# EAGLE board frisk-half (EAGLE 5.11)
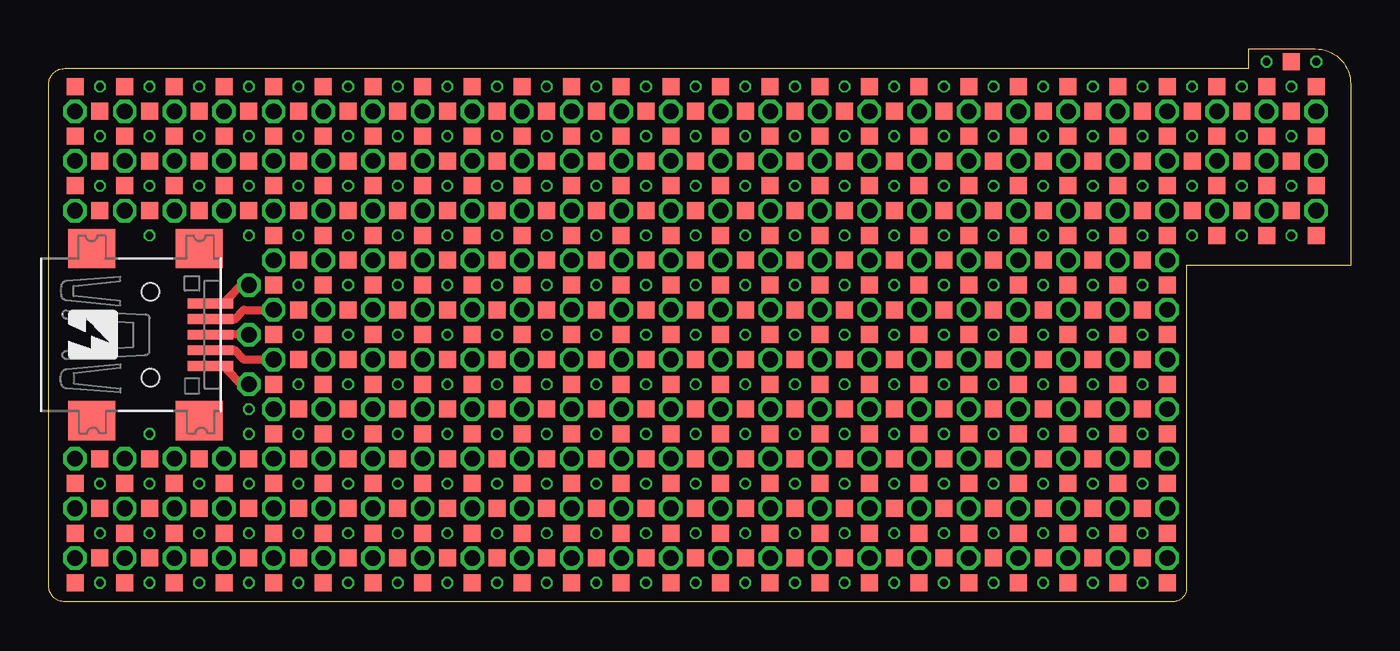
[diagram p0: board, top side]
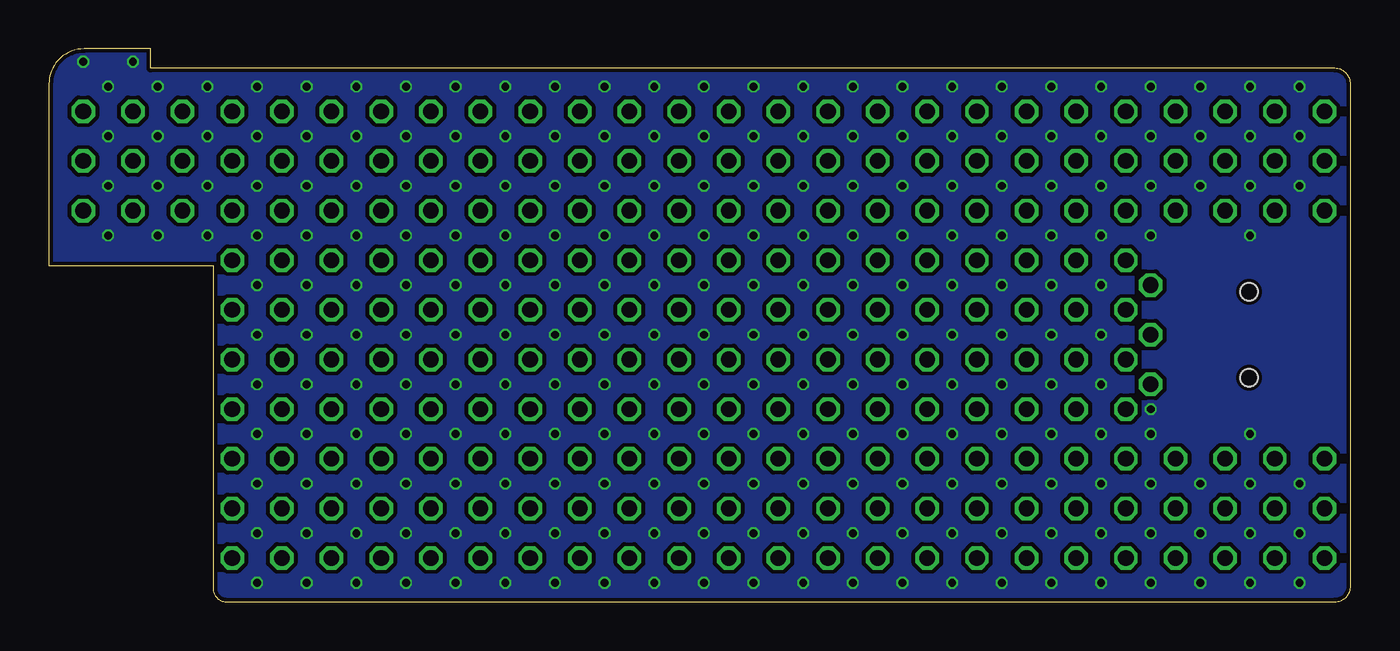
[diagram p1: board, bottom side, seen from below]

Size 66.6 x 28.3 mm. Coordinates in mm from the lower left corner, seen from the top.
Outline: 66.6,17.2 58.2,17.2 58.2,0.8 arc-90 57.6,0 0.8,0 arc-90 0,0.8 0,26.5 arc-90 0.8,27.3 61.4,27.3 61.4,28.3 64.8,28.3 arc-90 66.6,26.5 66.6,17.2
Copper layers (1*16): Top 0.035mm / dielectric 1.5mm / Bottom 0.035mm
Design rules "PCBCartFine *": minimum track width 0.2mm, minimum drill 0.4mm, track to track 0.2mm, track to pad 0.2mm, pad to pad 0.2mm, via to via 0.2mm, smd to smd 0.2mm, copper to edge 0.2mm, drill to drill 0.2mm, minimum pad ring 0.1mm, minimum via ring 0.1mm, stop-mask expansion 4mil, vias tented up to drill 0.5mm, thermal gap 0.2mm

## Footprints (pad centres in the part's own frame; a part is rotated, then mirrored left to right if it is on the bottom)
PAD = smd 0.87 x 0.87: P$1 0,0
USB-MINIB = smd 0.5 x 2.308: D+ 0,4.064; D- -0.8,4.064; GND 1.6,4.064; ID 0.8,4.064; VBUS -1.6,4.064 | smd 2 x 2.4: GND1 -4.4,-2; GND2 -4.4,3.5; GND3 4.4,3.5; GND4 4.4,-2 | hole 0.9: -2.2,1; 2.2,1

## Placement (x,y rotation side)
E$1  [PAD]  2.61,25.1 0 top
E$2  [PAD]  5.15,25.1 0 top
E$3  [LOGO]  3.52,12.4 90 top
E$4  [USB-MINIB]  4.2,13.67 270 top
E$5  [PAD]  7.69,25.1 0 top
E$6  [PAD]  10.23,25.1 0 top
E$7  [PAD]  12.77,25.1 0 top
E$8  [PAD]  15.31,25.1 0 top
E$9  [PAD]  17.85,25.1 0 top
E$10  [PAD]  20.39,25.1 0 top
E$11  [PAD]  22.93,25.1 0 top
E$12  [PAD]  1.34,23.83 0 top
E$13  [PAD]  3.88,23.83 0 top
E$14  [PAD]  6.42,23.83 0 top
E$15  [PAD]  8.96,23.83 0 top
E$16  [PAD]  11.5,23.83 0 top
E$17  [PAD]  14.04,23.83 0 top
E$18  [PAD]  16.58,23.83 0 top
E$19  [PAD]  19.12,23.83 0 top
E$20  [PAD]  21.66,23.83 0 top
E$21  [PAD]  2.61,22.56 0 top
E$22  [PAD]  5.15,22.56 0 top
E$23  [PAD]  7.69,22.56 0 top
E$24  [PAD]  10.23,22.56 0 top
E$25  [PAD]  12.77,22.56 0 top
E$26  [PAD]  15.31,22.56 0 top
E$27  [PAD]  17.85,22.56 0 top
E$28  [PAD]  20.39,22.56 0 top
E$29  [PAD]  1.34,21.29 0 top
E$30  [PAD]  3.88,21.29 0 top
E$31  [PAD]  6.42,21.29 0 top
E$32  [PAD]  8.96,21.29 0 top
E$33  [PAD]  11.5,21.29 0 top
E$34  [PAD]  14.04,21.29 0 top
E$35  [PAD]  16.58,21.29 0 top
E$36  [PAD]  19.12,21.29 0 top
E$37  [PAD]  2.61,20.02 0 top
E$38  [PAD]  5.15,20.02 0 top
E$39  [PAD]  7.69,20.02 0 top
E$40  [PAD]  10.23,20.02 0 top
E$41  [PAD]  12.77,20.02 0 top
E$42  [PAD]  15.31,20.02 0 top
E$43  [PAD]  17.85,20.02 0 top
E$44  [PAD]  20.39,20.02 0 top
E$45  [PAD]  21.66,21.29 0 top
E$46  [PAD]  22.93,22.56 0 top
E$47  [PAD]  22.93,20.02 0 top
E$48  [PAD]  1.34,26.37 0 top
E$49  [PAD]  3.88,26.37 0 top
E$50  [PAD]  6.42,26.37 0 top
E$51  [PAD]  8.96,26.37 0 top
E$52  [PAD]  11.5,26.37 0 top
E$53  [PAD]  14.04,26.37 0 top
E$54  [PAD]  16.58,26.37 0 top
E$55  [PAD]  19.12,26.37 0 top
E$56  [PAD]  21.66,26.37 0 top
E$57  [PAD]  11.5,18.75 0 top
E$58  [PAD]  14.04,18.75 0 top
E$59  [PAD]  16.58,18.75 0 top
E$60  [PAD]  19.12,18.75 0 top
E$61  [PAD]  21.66,18.75 0 top
E$62  [PAD]  11.5,16.21 0 top
E$63  [PAD]  12.77,17.48 0 top
E$64  [PAD]  15.31,17.48 0 top
E$65  [PAD]  14.04,16.21 0 top
E$66  [PAD]  17.85,17.48 0 top
E$67  [PAD]  20.39,17.48 0 top
E$68  [PAD]  22.93,17.48 0 top
E$69  [PAD]  16.58,16.21 0 top
E$70  [PAD]  19.12,16.21 0 top
E$71  [PAD]  21.66,16.21 0 top
E$72  [PAD]  12.77,14.94 0 top
E$73  [PAD]  15.31,14.94 0 top
E$74  [PAD]  17.85,14.94 0 top
E$75  [PAD]  20.39,14.94 0 top
E$76  [PAD]  22.93,14.94 0 top
E$77  [PAD]  11.5,13.67 0 top
E$78  [PAD]  14.04,13.67 0 top
E$79  [PAD]  16.58,13.67 0 top
E$80  [PAD]  19.12,13.67 0 top
E$81  [PAD]  21.66,13.67 0 top
E$82  [PAD]  12.77,12.4 0 top
E$83  [PAD]  15.31,12.4 0 top
E$84  [PAD]  17.85,12.4 0 top
E$85  [PAD]  20.39,12.4 0 top
E$86  [PAD]  22.93,12.4 0 top
E$87  [PAD]  11.5,11.13 0 top
E$88  [PAD]  14.04,11.13 0 top
E$89  [PAD]  16.58,11.13 0 top
E$90  [PAD]  19.12,11.13 0 top
E$91  [PAD]  21.66,11.13 0 top
E$92  [PAD]  12.77,9.86 0 top
E$93  [PAD]  15.31,9.86 0 top
E$94  [PAD]  17.85,9.86 0 top
E$95  [PAD]  20.39,9.86 0 top
E$96  [PAD]  22.93,9.86 0 top
E$97  [PAD]  11.5,8.59 0 top
E$98  [PAD]  14.04,8.59 0 top
E$99  [PAD]  16.58,8.59 0 top
E$100  [PAD]  19.12,8.59 0 top
E$101  [PAD]  21.66,8.59 0 top
E$102  [PAD]  2.61,7.32 0 top
E$103  [PAD]  5.15,7.32 0 top
E$104  [PAD]  7.69,7.32 0 top
E$105  [PAD]  10.23,7.32 0 top
E$106  [PAD]  12.77,7.32 0 top
E$107  [PAD]  15.31,7.32 0 top
E$108  [PAD]  17.85,7.32 0 top
E$109  [PAD]  20.39,7.32 0 top
E$110  [PAD]  22.93,7.32 0 top
E$111  [PAD]  1.34,6.05 0 top
E$112  [PAD]  3.88,6.05 0 top
E$113  [PAD]  6.42,6.05 0 top
E$114  [PAD]  8.96,6.05 0 top
E$115  [PAD]  11.5,6.05 0 top
E$116  [PAD]  14.04,6.05 0 top
E$117  [PAD]  16.58,6.05 0 top
E$118  [PAD]  19.12,6.05 0 top
E$119  [PAD]  21.66,6.05 0 top
E$120  [PAD]  2.61,4.78 0 top
E$121  [PAD]  5.15,4.78 0 top
E$122  [PAD]  7.69,4.78 0 top
E$123  [PAD]  10.23,4.78 0 top
E$124  [PAD]  12.77,4.78 0 top
E$125  [PAD]  15.31,4.78 0 top
E$126  [PAD]  17.85,4.78 0 top
E$127  [PAD]  20.39,4.78 0 top
E$128  [PAD]  22.93,4.78 0 top
E$129  [PAD]  1.34,3.51 0 top
E$130  [PAD]  3.88,3.51 0 top
E$131  [PAD]  6.42,3.51 0 top
E$132  [PAD]  8.96,3.51 0 top
E$133  [PAD]  11.5,3.51 0 top
E$134  [PAD]  14.04,3.51 0 top
E$135  [PAD]  16.58,3.51 0 top
E$136  [PAD]  19.12,3.51 0 top
E$137  [PAD]  21.66,3.51 0 top
E$138  [PAD]  2.61,2.24 0 top
E$139  [PAD]  5.15,2.24 0 top
E$140  [PAD]  7.69,2.24 0 top
E$141  [PAD]  10.23,2.24 0 top
E$142  [PAD]  12.77,2.24 0 top
E$143  [PAD]  15.31,2.24 0 top
E$144  [PAD]  17.85,2.24 0 top
E$145  [PAD]  20.39,2.24 0 top
E$146  [PAD]  22.93,2.24 0 top
E$147  [PAD]  1.34,0.97 0 top
E$148  [PAD]  3.88,0.97 0 top
E$149  [PAD]  6.42,0.97 0 top
E$150  [PAD]  8.96,0.97 0 top
E$151  [PAD]  11.5,0.97 0 top
E$152  [PAD]  14.04,0.97 0 top
E$153  [PAD]  16.58,0.97 0 top
E$154  [PAD]  19.12,0.97 0 top
E$155  [PAD]  21.66,0.97 0 top
E$156  [PAD]  24.2,26.37 0 top
E$157  [PAD]  26.74,26.37 0 top
E$158  [PAD]  29.28,26.37 0 top
E$159  [PAD]  31.82,26.37 0 top
E$160  [PAD]  34.36,26.37 0 top
E$161  [PAD]  36.9,26.37 0 top
E$162  [PAD]  39.44,26.37 0 top
E$163  [PAD]  41.98,26.37 0 top
E$164  [PAD]  44.52,26.37 0 top
E$165  [PAD]  47.06,26.37 0 top
E$166  [PAD]  49.6,26.37 0 top
E$167  [PAD]  52.14,26.37 0 top
E$168  [PAD]  54.68,26.37 0 top
E$169  [PAD]  57.22,26.37 0 top
E$170  [PAD]  59.76,26.37 0 top
E$171  [PAD]  62.3,26.37 0 top
E$172  [PAD]  64.84,26.37 0 top
E$173  [PAD]  25.47,25.1 0 top
E$174  [PAD]  28.01,25.1 0 top
E$175  [PAD]  30.55,25.1 0 top
E$176  [PAD]  33.09,25.1 0 top
E$177  [PAD]  35.63,25.1 0 top
E$178  [PAD]  38.17,25.1 0 top
E$179  [PAD]  40.71,25.1 0 top
E$180  [PAD]  43.25,25.1 0 top
E$181  [PAD]  45.79,25.1 0 top
E$182  [PAD]  48.33,25.1 0 top
E$183  [PAD]  50.87,25.1 0 top
E$184  [PAD]  53.41,25.1 0 top
E$185  [PAD]  55.95,25.1 0 top
E$186  [PAD]  58.49,25.1 0 top
E$187  [PAD]  61.03,25.1 0 top
E$188  [PAD]  63.57,25.1 0 top
E$189  [PAD]  24.2,23.83 0 top
E$190  [PAD]  26.74,23.83 0 top
E$191  [PAD]  29.28,23.83 0 top
E$192  [PAD]  31.82,23.83 0 top
E$193  [PAD]  34.36,23.83 0 top
E$194  [PAD]  36.9,23.83 0 top
E$195  [PAD]  39.44,23.83 0 top
E$196  [PAD]  41.98,23.83 0 top
E$197  [PAD]  44.52,23.83 0 top
E$198  [PAD]  47.06,23.83 0 top
E$199  [PAD]  49.6,23.83 0 top
E$200  [PAD]  52.14,23.83 0 top
E$201  [PAD]  54.68,23.83 0 top
E$202  [PAD]  57.22,23.83 0 top
E$203  [PAD]  59.76,23.83 0 top
E$204  [PAD]  62.3,23.83 0 top
E$205  [PAD]  64.84,23.83 0 top
E$206  [PAD]  25.47,22.56 0 top
E$207  [PAD]  28.01,22.56 0 top
E$208  [PAD]  30.55,22.56 0 top
E$209  [PAD]  33.09,22.56 0 top
E$210  [PAD]  35.63,22.56 0 top
E$211  [PAD]  38.17,22.56 0 top
E$212  [PAD]  40.71,22.56 0 top
E$213  [PAD]  43.25,22.56 0 top
E$214  [PAD]  45.79,22.56 0 top
E$215  [PAD]  48.33,22.56 0 top
E$216  [PAD]  50.87,22.56 0 top
E$217  [PAD]  53.41,22.56 0 top
E$218  [PAD]  55.95,22.56 0 top
E$219  [PAD]  58.49,22.56 0 top
E$220  [PAD]  61.03,22.56 0 top
E$221  [PAD]  63.57,22.56 0 top
E$222  [PAD]  24.2,21.29 0 top
E$223  [PAD]  26.74,21.29 0 top
E$224  [PAD]  29.28,21.29 0 top
E$225  [PAD]  31.82,21.29 0 top
E$226  [PAD]  34.36,21.29 0 top
E$227  [PAD]  36.9,21.29 0 top
E$228  [PAD]  39.44,21.29 0 top
E$229  [PAD]  41.98,21.29 0 top
E$230  [PAD]  44.52,21.29 0 top
E$231  [PAD]  47.06,21.29 0 top
E$232  [PAD]  49.6,21.29 0 top
E$233  [PAD]  52.14,21.29 0 top
E$234  [PAD]  54.68,21.29 0 top
E$235  [PAD]  57.22,21.29 0 top
E$236  [PAD]  59.76,21.29 0 top
E$237  [PAD]  62.3,21.29 0 top
E$238  [PAD]  64.84,21.29 0 top
E$239  [PAD]  25.47,20.02 0 top
E$240  [PAD]  28.01,20.02 0 top
E$241  [PAD]  30.55,20.02 0 top
E$242  [PAD]  33.09,20.02 0 top
E$243  [PAD]  35.63,20.02 0 top
E$244  [PAD]  38.17,20.02 0 top
E$245  [PAD]  40.71,20.02 0 top
E$246  [PAD]  43.25,20.02 0 top
E$247  [PAD]  45.79,20.02 0 top
E$248  [PAD]  48.33,20.02 0 top
E$249  [PAD]  50.87,20.02 0 top
E$250  [PAD]  53.41,20.02 0 top
E$251  [PAD]  55.95,20.02 0 top
E$252  [PAD]  58.49,20.02 0 top
E$253  [PAD]  61.03,20.02 0 top
E$254  [PAD]  63.57,20.02 0 top
E$255  [PAD]  24.2,18.75 0 top
E$256  [PAD]  26.74,18.75 0 top
E$257  [PAD]  29.28,18.75 0 top
E$258  [PAD]  31.82,18.75 0 top
E$259  [PAD]  34.36,18.75 0 top
E$260  [PAD]  36.9,18.75 0 top
E$261  [PAD]  39.44,18.75 0 top
E$262  [PAD]  41.98,18.75 0 top
E$263  [PAD]  44.52,18.75 0 top
E$264  [PAD]  47.06,18.75 0 top
E$265  [PAD]  49.6,18.75 0 top
E$266  [PAD]  52.14,18.75 0 top
E$267  [PAD]  54.68,18.75 0 top
E$268  [PAD]  57.22,18.75 0 top
E$269  [PAD]  59.76,18.75 0 top
E$270  [PAD]  62.3,18.75 0 top
E$271  [PAD]  64.84,18.75 0 top
E$272  [PAD]  25.47,17.48 0 top
E$273  [PAD]  28.01,17.48 0 top
E$274  [PAD]  30.55,17.48 0 top
E$275  [PAD]  33.09,17.48 0 top
E$276  [PAD]  35.63,17.48 0 top
E$277  [PAD]  38.17,17.48 0 top
E$278  [PAD]  40.71,17.48 0 top
E$279  [PAD]  43.25,17.48 0 top
E$280  [PAD]  45.79,17.48 0 top
E$281  [PAD]  48.33,17.48 0 top
E$282  [PAD]  50.87,17.48 0 top
E$283  [PAD]  53.41,17.48 0 top
E$284  [PAD]  55.95,17.48 0 top
E$285  [PAD]  24.2,16.21 0 top
E$286  [PAD]  26.74,16.21 0 top
E$287  [PAD]  29.28,16.21 0 top
E$288  [PAD]  31.82,16.21 0 top
E$289  [PAD]  34.36,16.21 0 top
E$290  [PAD]  36.9,16.21 0 top
E$291  [PAD]  39.44,16.21 0 top
E$292  [PAD]  41.98,16.21 0 top
E$293  [PAD]  44.52,16.21 0 top
E$294  [PAD]  47.06,16.21 0 top
E$295  [PAD]  49.6,16.21 0 top
E$296  [PAD]  52.14,16.21 0 top
E$297  [PAD]  54.68,16.21 0 top
E$298  [PAD]  57.22,16.21 0 top
E$299  [PAD]  25.47,14.94 0 top
E$300  [PAD]  28.01,14.94 0 top
E$301  [PAD]  30.55,14.94 0 top
E$302  [PAD]  33.09,14.94 0 top
E$303  [PAD]  35.63,14.94 0 top
E$304  [PAD]  38.17,14.94 0 top
E$305  [PAD]  40.71,14.94 0 top
E$306  [PAD]  43.25,14.94 0 top
E$307  [PAD]  45.79,14.94 0 top
E$308  [PAD]  48.33,14.94 0 top
E$309  [PAD]  50.87,14.94 0 top
E$310  [PAD]  53.41,14.94 0 top
E$311  [PAD]  55.95,14.94 0 top
E$312  [PAD]  24.2,13.67 0 top
E$313  [PAD]  26.74,13.67 0 top
E$314  [PAD]  29.28,13.67 0 top
E$315  [PAD]  31.82,13.67 0 top
E$316  [PAD]  34.36,13.67 0 top
E$317  [PAD]  36.9,13.67 0 top
E$318  [PAD]  39.44,13.67 0 top
E$319  [PAD]  41.98,13.67 0 top
E$320  [PAD]  44.52,13.67 0 top
E$321  [PAD]  47.06,13.67 0 top
E$322  [PAD]  49.6,13.67 0 top
E$323  [PAD]  52.14,13.67 0 top
E$324  [PAD]  54.68,13.67 0 top
E$325  [PAD]  57.22,13.67 0 top
E$326  [PAD]  25.47,12.4 0 top
E$327  [PAD]  28.01,12.4 0 top
E$328  [PAD]  30.55,12.4 0 top
E$329  [PAD]  33.09,12.4 0 top
E$330  [PAD]  35.63,12.4 0 top
E$331  [PAD]  38.17,12.4 0 top
E$332  [PAD]  40.71,12.4 0 top
E$333  [PAD]  43.25,12.4 0 top
E$334  [PAD]  45.79,12.4 0 top
E$335  [PAD]  48.33,12.4 0 top
E$336  [PAD]  50.87,12.4 0 top
E$337  [PAD]  53.41,12.4 0 top
E$338  [PAD]  55.95,12.4 0 top
E$339  [PAD]  24.2,11.13 0 top
E$340  [PAD]  26.74,11.13 0 top
E$341  [PAD]  29.28,11.13 0 top
E$342  [PAD]  31.82,11.13 0 top
E$343  [PAD]  34.36,11.13 0 top
E$344  [PAD]  25.47,9.86 0 top
E$345  [PAD]  28.01,9.86 0 top
E$346  [PAD]  30.55,9.86 0 top
E$347  [PAD]  33.09,9.86 0 top
E$348  [PAD]  24.2,8.59 0 top
E$349  [PAD]  26.74,8.59 0 top
E$350  [PAD]  29.28,8.59 0 top
E$351  [PAD]  31.82,8.59 0 top
E$352  [PAD]  34.36,8.59 0 top
E$353  [PAD]  25.47,7.32 0 top
E$354  [PAD]  35.63,9.86 0 top
E$355  [PAD]  35.63,7.32 0 top
E$356  [PAD]  35.63,4.78 0 top
E$357  [PAD]  35.63,2.24 0 top
E$358  [PAD]  33.09,7.32 0 top
E$359  [PAD]  33.09,4.78 0 top
E$360  [PAD]  33.09,2.24 0 top
E$361  [PAD]  30.55,2.24 0 top
E$362  [PAD]  30.55,4.78 0 top
E$363  [PAD]  30.55,7.32 0 top
E$364  [PAD]  28.01,7.32 0 top
E$365  [PAD]  28.01,4.78 0 top
E$366  [PAD]  28.01,2.24 0 top
E$367  [PAD]  25.47,2.24 0 top
E$368  [PAD]  25.47,4.78 0 top
E$369  [PAD]  24.2,6.05 0 top
E$370  [PAD]  26.74,6.05 0 top
E$371  [PAD]  29.28,6.05 0 top
E$372  [PAD]  31.82,6.05 0 top
E$373  [PAD]  34.36,6.05 0 top
E$374  [PAD]  24.2,3.51 0 top
E$375  [PAD]  26.74,3.51 0 top
E$376  [PAD]  29.28,3.51 0 top
E$377  [PAD]  31.82,3.51 0 top
E$378  [PAD]  34.36,3.51 0 top
E$379  [PAD]  24.2,0.97 0 top
E$380  [PAD]  38.17,9.86 0 top
E$381  [PAD]  26.74,0.97 0 top
E$382  [PAD]  29.28,0.97 0 top
E$383  [PAD]  31.82,0.97 0 top
E$384  [PAD]  34.36,0.97 0 top
E$385  [PAD]  36.9,11.13 0 top
E$386  [PAD]  39.44,11.13 0 top
E$387  [PAD]  41.98,11.13 0 top
E$388  [PAD]  44.52,11.13 0 top
E$389  [PAD]  47.06,11.13 0 top
E$390  [PAD]  40.71,9.86 0 top
E$391  [PAD]  43.25,9.86 0 top
E$392  [PAD]  45.79,9.86 0 top
E$393  [PAD]  36.9,8.59 0 top
E$394  [PAD]  39.44,8.59 0 top
E$395  [PAD]  41.98,8.59 0 top
E$396  [PAD]  44.52,8.59 0 top
E$397  [PAD]  47.06,8.59 0 top
E$398  [PAD]  38.17,7.32 0 top
E$399  [PAD]  40.71,7.32 0 top
E$400  [PAD]  43.25,7.32 0 top
E$401  [PAD]  45.79,7.32 0 top
E$402  [PAD]  36.9,6.05 0 top
E$403  [PAD]  39.44,6.05 0 top
E$404  [PAD]  41.98,6.05 0 top
E$405  [PAD]  44.52,6.05 0 top
E$406  [PAD]  47.06,6.05 0 top
E$407  [PAD]  38.17,4.78 0 top
E$408  [PAD]  40.71,4.78 0 top
E$409  [PAD]  43.25,4.78 0 top
E$410  [PAD]  45.79,4.78 0 top
E$411  [PAD]  36.9,3.51 0 top
E$412  [PAD]  39.44,3.51 0 top
E$413  [PAD]  41.98,3.51 0 top
E$414  [PAD]  44.52,3.51 0 top
E$415  [PAD]  47.06,3.51 0 top
E$416  [PAD]  36.9,0.97 0 top
E$417  [PAD]  39.44,0.97 0 top
E$418  [PAD]  38.17,2.24 0 top
E$419  [PAD]  57.22,3.51 0 top
E$420  [PAD]  40.71,2.24 0 top
E$421  [PAD]  41.98,0.97 0 top
E$422  [PAD]  44.52,0.97 0 top
E$423  [PAD]  43.25,2.24 0 top
E$424  [PAD]  45.79,2.24 0 top
E$425  [PAD]  47.06,0.97 0 top
E$426  [PAD]  48.33,9.86 0 top
E$427  [PAD]  49.6,11.13 0 top
E$428  [PAD]  50.87,9.86 0 top
E$429  [PAD]  52.14,11.13 0 top
E$430  [PAD]  53.41,9.86 0 top
E$431  [PAD]  54.68,11.13 0 top
E$432  [PAD]  55.95,9.86 0 top
E$433  [PAD]  57.22,11.13 0 top
E$434  [PAD]  48.33,7.32 0 top
E$435  [PAD]  49.6,8.59 0 top
E$436  [PAD]  50.87,7.32 0 top
E$437  [PAD]  52.14,8.59 0 top
E$438  [PAD]  53.41,7.32 0 top
E$439  [PAD]  54.68,8.59 0 top
E$440  [PAD]  55.95,7.32 0 top
E$441  [PAD]  57.22,8.59 0 top
E$442  [PAD]  48.33,4.78 0 top
E$443  [PAD]  49.6,6.05 0 top
E$444  [PAD]  50.87,4.78 0 top
E$445  [PAD]  52.14,6.05 0 top
E$446  [PAD]  53.41,4.78 0 top
E$447  [PAD]  54.68,6.05 0 top
E$448  [PAD]  55.95,4.78 0 top
E$449  [PAD]  57.22,6.05 0 top
E$450  [PAD]  48.33,2.24 0 top
E$451  [PAD]  49.6,3.51 0 top
E$452  [PAD]  50.87,2.24 0 top
E$453  [PAD]  52.14,3.51 0 top
E$454  [PAD]  53.41,2.24 0 top
E$455  [PAD]  54.68,3.51 0 top
E$456  [PAD]  55.95,2.24 0 top
E$457  [PAD]  57.22,0.97 0 top
E$458  [PAD]  54.68,0.97 0 top
E$459  [PAD]  52.14,0.97 0 top
E$460  [PAD]  49.6,0.97 0 top
E$461  [PAD]  63.57,27.64 0 top

## Library data of the parts
E$1 E$2 E$5-E$461 = pad
E$3 = logo
E$4 = adafruit

## Tracks (layer width: path | path; a pad name or v marks a point on that pad's centre or on a via)
GND  (via drill 0.4)
  other vias: 2.61,26.37 5.15,26.37 7.69,26.37 10.23,26.37 12.77,26.37 15.31,26.37 17.85,26.37 20.39,26.37 22.93,26.37 25.47,26.37 28.01,26.37 30.55,26.37 33.09,26.37 35.63,26.37 38.17,26.37 40.71,26.37 43.25,26.37 45.79,26.37 63.57,26.37 61.03,26.37 58.49,26.37 55.95,26.37 53.41,26.37 50.87,26.37 48.33,26.37 2.61,23.83 5.15,23.83 7.69,23.83 10.23,23.83 12.77,23.83 15.31,23.83 17.85,23.83 20.39,23.83 22.93,23.83 2.61,21.29 5.15,21.29 7.69,21.29 10.23,21.29 12.77,21.29 15.31,21.29 17.85,21.29 20.39,21.29 22.93,21.29 10.23,18.75 12.77,18.75 15.31,18.75 17.85,18.75 20.39,18.75 22.93,18.75 25.47,18.75 28.01,18.75 30.55,18.75 12.77,16.21 15.31,16.21 17.85,16.21 20.39,16.21 22.93,16.21 25.47,16.21 28.01,16.21 30.55,16.21 33.09,16.21 12.77,13.67 15.31,13.67 17.85,13.67 20.39,13.67 22.93,13.67 25.47,13.67 28.01,13.67 30.55,13.67 33.09,13.67 12.77,11.13 15.31,11.13 17.85,11.13 20.39,11.13 22.93,11.13 25.47,11.13 28.01,11.13 30.55,11.13 33.09,11.13 10.23,8.59 12.77,8.59 15.31,8.59 17.85,8.59 20.39,8.59 22.93,8.59 25.47,8.59 28.01,8.59 30.55,8.59 2.61,6.05 5.15,6.05 7.69,6.05 10.23,6.05 12.77,6.05 15.31,6.05 17.85,6.05 20.39,6.05 22.93,6.05 2.61,3.51 5.15,3.51 7.69,3.51 10.23,3.51 12.77,3.51 15.31,3.51 17.85,3.51 20.39,3.51 22.93,3.51 2.61,0.97 5.15,0.97 7.69,0.97 10.23,0.97 12.77,0.97 15.31,0.97 17.85,0.97 20.39,0.97 22.93,0.97 25.47,23.83 28.01,23.83 30.55,23.83 33.09,23.83 35.63,23.83 38.17,23.83 40.71,23.83 43.25,23.83 45.79,23.83 25.47,21.29 28.01,21.29 30.55,21.29 33.09,21.29 35.63,21.29 38.17,21.29 40.71,21.29 43.25,21.29 45.79,21.29 33.09,18.75 35.63,18.75 38.17,18.75 40.71,18.75 43.25,18.75 45.79,18.75 48.33,18.75 50.87,18.75 53.41,18.75 35.63,16.21 38.17,16.21 40.71,16.21 43.25,16.21 45.79,16.21 48.33,16.21 50.87,16.21 53.41,16.21 55.95,16.21 35.63,13.67 38.17,13.67 40.71,13.67 43.25,13.67 45.79,13.67 48.33,13.67 50.87,13.67 53.41,13.67 55.95,13.67 35.63,11.13 38.17,11.13 40.71,11.13 43.25,11.13 45.79,11.13 48.33,11.13 50.87,11.13 53.41,11.13 55.95,11.13 33.09,8.59 35.63,8.59 38.17,8.59 40.71,8.59 43.25,8.59 45.79,8.59 48.33,8.59 50.87,8.59 53.41,8.59 25.47,6.05 28.01,6.05 30.55,6.05 33.09,6.05 35.63,6.05 38.17,6.05 40.71,6.05 43.25,6.05 45.79,6.05 25.47,3.51 28.01,3.51 30.55,3.51 33.09,3.51 35.63,3.51 38.17,3.51 40.71,3.51 43.25,3.51 45.79,3.51 25.47,0.97 28.01,0.97 30.55,0.97 33.09,0.97 35.63,0.97 38.17,0.97 40.71,0.97 43.25,0.97 45.79,0.97 63.57,23.83 61.03,23.83 58.49,23.83 55.95,23.83 53.41,23.83 50.87,23.83 48.33,23.83 63.57,21.29 61.03,21.29 58.49,21.29 55.95,21.29 53.41,21.29 50.87,21.29 48.33,21.29 63.57,18.75 61.03,18.75 58.49,18.75 55.95,18.75 55.95,8.59 55.95,6.05 53.41,6.05 50.87,6.05 48.33,6.05 55.95,3.51 53.41,3.51 50.87,3.51 48.33,3.51 55.95,0.97 53.41,0.97 50.87,0.97 48.33,0.97 5.15,18.75 5.15,8.59 10.23,9.86 62.3,27.64 64.84,27.64
  pour Bottom (isolate 0.2): -1.2,-0.3 67.38,-0.3 67.38,28.91 -1.2,28.91
S$1  (via drill 0.8)
  other vias: 1.34,7.32
S$2  (via drill 0.8)
  other vias: 3.88,7.32
S$3  (via drill 0.8)
  other vias: 6.42,7.32
S$4  (via drill 0.8)
  other vias: 8.96,7.32
S$24  (via drill 0.8)
  other vias: 1.34,2.24
S$25  (via drill 0.8)
  other vias: 3.88,2.24
S$26  (via drill 0.8)
  other vias: 6.42,2.24
S$27  (via drill 0.8)
  other vias: 8.96,2.24
S$28  (via drill 0.8)
  other vias: 11.5,2.24
S$29  (via drill 0.8)
  other vias: 14.04,2.24
S$30  (via drill 0.8)
  other vias: 16.58,2.24
S$31  (via drill 0.8)
  other vias: 19.12,2.24
S$32  (via drill 0.8)
  other vias: 21.66,2.24
S$33  (via drill 0.8)
  other vias: 24.2,2.24
S$34  (via drill 0.8)
  other vias: 26.74,2.24
S$35  (via drill 0.8)
  other vias: 29.28,2.24
S$36  (via drill 0.8)
  other vias: 31.82,2.24
S$37  (via drill 0.8)
  other vias: 34.36,2.24
S$38  (via drill 0.8)
  other vias: 36.9,2.24
S$39  (via drill 0.8)
  other vias: 39.44,2.24
S$40  (via drill 0.8)
  other vias: 41.98,2.24
S$41  (via drill 0.8)
  other vias: 44.52,2.24
S$42  (via drill 0.8)
  other vias: 47.06,2.24
S$43  (via drill 0.8)
  other vias: 49.6,2.24
S$44  (via drill 0.8)
  other vias: 52.14,2.24
S$45  (via drill 0.8)
  other vias: 54.68,2.24
S$46  (via drill 0.8)
  other vias: 57.22,2.24
S$47  (via drill 0.8)
  other vias: 1.34,4.78
S$48  (via drill 0.8)
  other vias: 3.88,4.78
S$49  (via drill 0.8)
  other vias: 6.42,4.78
S$50  (via drill 0.8)
  other vias: 8.96,4.78
S$51  (via drill 0.8)
  other vias: 11.5,4.78
S$52  (via drill 0.8)
  other vias: 14.04,4.78
S$53  (via drill 0.8)
  other vias: 16.58,4.78
S$54  (via drill 0.8)
  other vias: 19.12,4.78
S$55  (via drill 0.8)
  other vias: 21.66,4.78
S$56  (via drill 0.8)
  other vias: 24.2,4.78
S$57  (via drill 0.8)
  other vias: 26.74,4.78
S$58  (via drill 0.8)
  other vias: 29.28,4.78
S$59  (via drill 0.8)
  other vias: 31.82,4.78
S$60  (via drill 0.8)
  other vias: 34.36,4.78
S$61  (via drill 0.8)
  other vias: 36.9,4.78
S$62  (via drill 0.8)
  other vias: 39.44,4.78
S$63  (via drill 0.8)
  other vias: 41.98,4.78
S$64  (via drill 0.8)
  other vias: 44.52,4.78
S$65  (via drill 0.8)
  other vias: 47.06,4.78
S$66  (via drill 0.8)
  other vias: 49.6,4.78
S$67  (via drill 0.8)
  other vias: 52.14,4.78
S$68  (via drill 0.8)
  other vias: 54.68,4.78
S$69  (via drill 0.8)
  other vias: 57.22,4.78
S$70  (via drill 0.8)
  other vias: 11.5,7.32
S$71  (via drill 0.8)
  other vias: 14.04,7.32
S$72  (via drill 0.8)
  other vias: 16.58,7.32
S$73  (via drill 0.8)
  other vias: 19.12,7.32
S$74  (via drill 0.8)
  other vias: 21.66,7.32
S$75  (via drill 0.8)
  other vias: 24.2,7.32
S$76  (via drill 0.8)
  other vias: 26.74,7.32
S$77  (via drill 0.8)
  other vias: 29.28,7.32
S$78  (via drill 0.8)
  other vias: 31.82,7.32
S$79  (via drill 0.8)
  other vias: 34.36,7.32
S$80  (via drill 0.8)
  other vias: 36.9,7.32
S$81  (via drill 0.8)
  other vias: 39.44,7.32
S$82  (via drill 0.8)
  other vias: 41.98,7.32
S$83  (via drill 0.8)
  other vias: 44.52,7.32
S$84  (via drill 0.8)
  other vias: 47.06,7.32
S$85  (via drill 0.8)
  other vias: 49.6,7.32
S$86  (via drill 0.8)
  other vias: 52.14,7.32
S$87  (via drill 0.8)
  other vias: 54.68,7.32
S$88  (via drill 0.8)
  other vias: 57.22,7.32
S$89  (via drill 0.8)
  other vias: 11.5,9.86
S$90  (via drill 0.8)
  other vias: 14.04,9.86
S$91  (via drill 0.8)
  other vias: 16.58,9.86
S$92  (via drill 0.8)
  other vias: 19.12,9.86
S$93  (via drill 0.8)
  other vias: 21.66,9.86
S$94  (via drill 0.8)
  other vias: 24.2,9.86
S$95  (via drill 0.8)
  other vias: 26.74,9.86
S$96  (via drill 0.8)
  other vias: 29.28,9.86
S$97  (via drill 0.8)
  other vias: 31.82,9.86
S$98  (via drill 0.8)
  other vias: 34.36,9.86
S$99  (via drill 0.8)
  other vias: 36.9,9.86
S$100  (via drill 0.8)
  other vias: 39.44,9.86
S$101  (via drill 0.8)
  other vias: 41.98,9.86
S$102  (via drill 0.8)
  other vias: 44.52,9.86
S$103  (via drill 0.8)
  other vias: 47.06,9.86
S$104  (via drill 0.8)
  other vias: 49.6,9.86
S$105  (via drill 0.8)
  other vias: 52.14,9.86
S$106  (via drill 0.8)
  other vias: 54.68,9.86
S$107  (via drill 0.8)
  other vias: 57.22,9.86
S$109  (via drill 0.8)
  other vias: 14.04,12.4
S$110  (via drill 0.8)
  other vias: 16.58,12.4
S$111  (via drill 0.8)
  other vias: 19.12,12.4
S$112  (via drill 0.8)
  other vias: 21.66,12.4
S$113  (via drill 0.8)
  other vias: 24.2,12.4
S$114  (via drill 0.8)
  other vias: 26.74,12.4
S$115  (via drill 0.8)
  other vias: 29.28,12.4
S$116  (via drill 0.8)
  other vias: 31.82,12.4
S$117  (via drill 0.8)
  other vias: 34.36,12.4
S$118  (via drill 0.8)
  other vias: 36.9,12.4
S$119  (via drill 0.8)
  other vias: 39.44,12.4
S$120  (via drill 0.8)
  other vias: 41.98,12.4
S$121  (via drill 0.8)
  other vias: 44.52,12.4
S$122  (via drill 0.8)
  other vias: 47.06,12.4
S$123  (via drill 0.8)
  other vias: 49.6,12.4
S$124  (via drill 0.8)
  other vias: 52.14,12.4
S$125  (via drill 0.8)
  other vias: 54.68,12.4
S$126  (via drill 0.8)
  other vias: 57.22,12.4
S$128  (via drill 0.8)
  other vias: 14.04,14.94
S$129  (via drill 0.8)
  other vias: 16.58,14.94
S$130  (via drill 0.8)
  other vias: 19.12,14.94
S$131  (via drill 0.8)
  other vias: 21.66,14.94
S$132  (via drill 0.8)
  other vias: 24.2,14.94
S$133  (via drill 0.8)
  other vias: 26.74,14.94
S$134  (via drill 0.8)
  other vias: 29.28,14.94
S$135  (via drill 0.8)
  other vias: 31.82,14.94
S$136  (via drill 0.8)
  other vias: 34.36,14.94
S$137  (via drill 0.8)
  other vias: 36.9,14.94
S$138  (via drill 0.8)
  other vias: 39.44,14.94
S$139  (via drill 0.8)
  other vias: 41.98,14.94
S$140  (via drill 0.8)
  other vias: 44.52,14.94
S$141  (via drill 0.8)
  other vias: 47.06,14.94
S$142  (via drill 0.8)
  other vias: 49.6,14.94
S$143  (via drill 0.8)
  other vias: 52.14,14.94
S$144  (via drill 0.8)
  other vias: 54.68,14.94
S$145  (via drill 0.8)
  other vias: 57.22,14.94
S$146  (via drill 0.8)
  other vias: 11.5,17.48
S$147  (via drill 0.8)
  other vias: 14.04,17.48
S$148  (via drill 0.8)
  other vias: 16.58,17.48
S$149  (via drill 0.8)
  other vias: 19.12,17.48
S$150  (via drill 0.8)
  other vias: 21.66,17.48
S$151  (via drill 0.8)
  other vias: 24.2,17.48
S$152  (via drill 0.8)
  other vias: 26.74,17.48
S$153  (via drill 0.8)
  other vias: 29.28,17.48
S$154  (via drill 0.8)
  other vias: 31.82,17.48
S$155  (via drill 0.8)
  other vias: 34.36,17.48
S$156  (via drill 0.8)
  other vias: 36.9,17.48
S$157  (via drill 0.8)
  other vias: 39.44,17.48
S$158  (via drill 0.8)
  other vias: 41.98,17.48
S$159  (via drill 0.8)
  other vias: 44.52,17.48
S$160  (via drill 0.8)
  other vias: 47.06,17.48
S$161  (via drill 0.8)
  other vias: 49.6,17.48
S$162  (via drill 0.8)
  other vias: 52.14,17.48
S$163  (via drill 0.8)
  other vias: 54.68,17.48
S$164  (via drill 0.8)
  other vias: 57.22,17.48
S$168  (via drill 0.8)
  other vias: 1.34,20.02
S$169  (via drill 0.8)
  other vias: 3.88,20.02
S$170  (via drill 0.8)
  other vias: 6.42,20.02
S$171  (via drill 0.8)
  other vias: 8.96,20.02
S$172  (via drill 0.8)
  other vias: 11.5,20.02
S$173  (via drill 0.8)
  other vias: 14.04,20.02
S$174  (via drill 0.8)
  other vias: 16.58,20.02
S$175  (via drill 0.8)
  other vias: 19.12,20.02
S$176  (via drill 0.8)
  other vias: 21.66,20.02
S$177  (via drill 0.8)
  other vias: 24.2,20.02
S$178  (via drill 0.8)
  other vias: 26.74,20.02
S$179  (via drill 0.8)
  other vias: 29.28,20.02
S$180  (via drill 0.8)
  other vias: 31.82,20.02
S$181  (via drill 0.8)
  other vias: 34.36,20.02
S$182  (via drill 0.8)
  other vias: 36.9,20.02
S$183  (via drill 0.8)
  other vias: 39.44,20.02
S$184  (via drill 0.8)
  other vias: 41.98,20.02
S$185  (via drill 0.8)
  other vias: 44.52,20.02
S$186  (via drill 0.8)
  other vias: 47.06,20.02
S$187  (via drill 0.8)
  other vias: 49.6,20.02
S$188  (via drill 0.8)
  other vias: 52.14,20.02
S$189  (via drill 0.8)
  other vias: 54.68,20.02
S$190  (via drill 0.8)
  other vias: 57.22,20.02
S$191  (via drill 0.8)
  other vias: 59.76,20.02
S$192  (via drill 0.8)
  other vias: 62.3,20.02
S$193  (via drill 0.8)
  other vias: 64.84,20.02
S$194  (via drill 0.8)
  other vias: 1.34,22.56
S$195  (via drill 0.8)
  other vias: 3.88,22.56
S$196  (via drill 0.8)
  other vias: 6.42,22.56
S$197  (via drill 0.8)
  other vias: 8.96,22.56
S$198  (via drill 0.8)
  other vias: 11.5,22.56
S$199  (via drill 0.8)
  other vias: 14.04,22.56
S$200  (via drill 0.8)
  other vias: 16.58,22.56
S$201  (via drill 0.8)
  other vias: 19.12,22.56
S$202  (via drill 0.8)
  other vias: 21.66,22.56
S$203  (via drill 0.8)
  other vias: 24.2,22.56
S$204  (via drill 0.8)
  other vias: 26.74,22.56
S$205  (via drill 0.8)
  other vias: 29.28,22.56
S$206  (via drill 0.8)
  other vias: 31.82,22.56
S$207  (via drill 0.8)
  other vias: 34.36,22.56
S$208  (via drill 0.8)
  other vias: 36.9,22.56
S$209  (via drill 0.8)
  other vias: 39.44,22.56
S$210  (via drill 0.8)
  other vias: 41.98,22.56
S$211  (via drill 0.8)
  other vias: 44.52,22.56
S$212  (via drill 0.8)
  other vias: 47.06,22.56
S$213  (via drill 0.8)
  other vias: 49.6,22.56
S$214  (via drill 0.8)
  other vias: 52.14,22.56
S$215  (via drill 0.8)
  other vias: 54.68,22.56
S$216  (via drill 0.8)
  other vias: 57.22,22.56
S$217  (via drill 0.8)
  other vias: 59.76,22.56
S$218  (via drill 0.8)
  other vias: 62.3,22.56
S$219  (via drill 0.8)
  other vias: 64.84,22.56
S$220  (via drill 0.8)
  other vias: 1.34,25.1
S$221  (via drill 0.8)
  other vias: 3.88,25.1
S$222  (via drill 0.8)
  other vias: 6.42,25.1
S$223  (via drill 0.8)
  other vias: 8.96,25.1
S$224  (via drill 0.8)
  other vias: 11.5,25.1
S$225  (via drill 0.8)
  other vias: 14.04,25.1
S$226  (via drill 0.8)
  other vias: 16.58,25.1
S$227  (via drill 0.8)
  other vias: 19.12,25.1
S$228  (via drill 0.8)
  other vias: 21.66,25.1
S$229  (via drill 0.8)
  other vias: 24.2,25.1
S$230  (via drill 0.8)
  other vias: 26.74,25.1
S$231  (via drill 0.8)
  other vias: 29.28,25.1
S$232  (via drill 0.8)
  other vias: 31.82,25.1
S$233  (via drill 0.8)
  other vias: 34.36,25.1
S$234  (via drill 0.8)
  other vias: 36.9,25.1
S$235  (via drill 0.8)
  other vias: 39.44,25.1
S$236  (via drill 0.8)
  other vias: 41.98,25.1
S$237  (via drill 0.8)
  other vias: 44.52,25.1
S$238  (via drill 0.8)
  other vias: 47.06,25.1
S$239  (via drill 0.8)
  other vias: 49.6,25.1
S$240  (via drill 0.8)
  other vias: 52.14,25.1
S$241  (via drill 0.8)
  other vias: 54.68,25.1
S$242  (via drill 0.8)
  other vias: 57.22,25.1
S$243  (via drill 0.8)
  other vias: 59.76,25.1
S$244  (via drill 0.8)
  other vias: 62.3,25.1
S$245  (via drill 0.8)
  other vias: 64.84,25.1
S$331  (via drill 0.8)
  Top 0.406: v11.5,12.4 9.98,12.4 9.47,12.91
S$350  (via drill 0.8)
  Top 0.406: v11.5,14.94 9.98,14.94 9.47,14.43
S$463  (via drill 0.8)
  Top 0.406: v10.23,11.13 9.85,11.13 9.09,11.89
S$464  (via drill 0.8)
  Top 0.406: v10.23,13.67 8.96,13.67
S$465  (via drill 0.8)
  Top 0.406: v10.23,16.21 9.85,16.21 9.09,15.45

## Text on the board
Document: Copyright (c) 2011 SWITCHSCIENCE | CC BY-SA 2.1